# EAGLE board Skiff Power Panel (EAGLE 9.6.2)
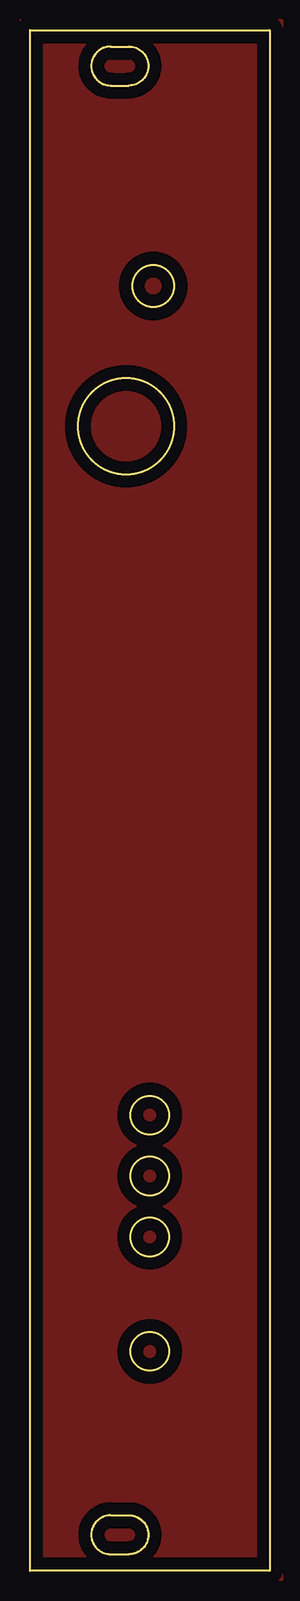
[diagram p0: board, top side]

Size 20 x 128.4 mm. Coordinates in mm from the lower left corner, seen from the top.
Outline: 0,0 0,128.4 20,128.4 20,0 0,0
Outline: 6.74,127.03 8.26,127.03 arc-180 8.26,123.78 6.74,123.78 arc-180 6.74,127.03
Outline: 6.74,4.62 8.26,4.62 arc-180 8.26,1.38 6.74,1.38 arc-180 6.74,4.62
Outline: circle at 10,18.29 radius 1.6
Outline: circle at 10,27.81 radius 1.6
Outline: circle at 10,37.97 radius 1.6
Outline: circle at 10,32.89 radius 1.6
Outline: circle at 10.29,107.06 radius 1.75
Outline: circle at 8.03,95.38 radius 4
Copper layers (1*16): Top 0.035mm / dielectric 1.5mm / Bottom 0.035mm
Design rules "default": minimum track width 6mil, minimum drill 0.35mm, track to track 6mil, track to pad 6mil, pad to pad 6mil, via to via 6mil, smd to smd 6mil, copper to edge 40mil, drill to drill 6mil, minimum pad ring 10mil, minimum via ring 8mil, stop-mask expansion 4mil, vias tented up to drill 0mil, thermal gap 10mil

## Placement (x,y rotation side)
E$1  [GMSN!_LOGO]  9.4,71.81 0 bottom

## Library data of the parts
E$1 = GMSN

## Tracks (layer width: path | path; a pad name or v marks a point on that pad's centre or on a via)
GND
  pour Top: -0.79,129.24 21.06,129.24 21.06,-0.79 -0.79,-0.79